# EAGLE board Amazing Leelo (EAGLE 9.7.0)

Size 166.4 x 105.07 mm. Coordinates in mm from the lower left corner, seen from the top.
Outline: 0,0 166.4,0 166.4,105.07 0,105.07 0,0
Copper layers (1*16): Top 0.035mm / dielectric 1.5mm / Bottom 0.035mm
Design rules "default": minimum track width 6mil, minimum drill 0.35mm, track to track 6mil, track to pad 6mil, pad to pad 6mil, via to via 6mil, smd to smd 6mil, copper to edge 40mil, drill to drill 6mil, minimum pad ring 10mil, minimum via ring 8mil, stop-mask expansion 4mil, vias tented up to drill 0mil, thermal gap 10mil

## Footprints (pad centres in the part's own frame; a part is rotated, then mirrored left to right if it is on the bottom)
LEDRD254W60D565H860B = drill 0.981 pad 1.581: 1 -1.27,0; 2 1.27,0
LEDRD254W60D565H860B_B = drill 0.981 pad 1.581: 1 -1.27,0; 2 1.27,0
HC-SR04 = drill 1.016 long: 1 -3.81,0; 2 -1.27,0; 3 1.27,0; 4 3.81,0
RESAD1016W63L850D250B = drill 0.83 pad 1.43: 1 -5.08,0; 2 5.08,0
HA-06-SM065 = drill 1 pad 1.676: 1 -2.54,-2.54; 2 0,2.54; 3 2.54,-2.54
SWITCH-SPDT-PTH-8.5X3.7MM = drill 1.016 pad 1.88: 1 -2.54,0; 2 0,0; 3 2.54,0
SG90 = drill 1.016 long: 1 -2.54,0; 2 0,0; 3 2.54,0
ARDUINO-UNO-R3-SHIELD = drill 1.016 pad 1.88: 3.3V 24.13,-2.54; 5V 24.13,0; A0 24.13,12.7; A1 24.13,15.24; A2 24.13,17.78; A3 24.13,20.32; A4 24.13,22.86; A5 24.13,25.4; AREF -24.13,-13.97; D2 -24.13,20.32; D3 -24.13,17.78; D4 -24.13,15.24; D5 -24.13,12.7; D6 -24.13,10.16; D7 -24.13,7.62; D8 -24.13,3.81; D9 -24.13,1.27; D10 -24.13,-1.27; D11 -24.13,-3.81; D12 -24.13,-6.35; D13 -24.13,-8.89; GND@0 24.13,2.54; GND@1 24.13,5.08; GND@2 -24.13,-11.43; IOREF 24.13,-7.62; NC 24.13,-10.16; RES 24.13,-5.08; RX -24.13,25.4; SCL -24.13,-19.05; SDA -24.13,-16.51; TX -24.13,22.86; VIN 24.13,7.62
TSOP48 = drill 0.8: 1 -2.54,0; 2 0,0; 3 2.54,0

## Placement (x,y rotation side)
D1  RED  [LEDRD254W60D565H860B]  66.01,27.94 180 top
D2  BLUE  [LEDRD254W60D565H860B_B]  73.63,27.94 180 top
DIST1  DISTANCE-SENSOR-4PINHC-SR04  [HC-SR04]  140.36,70.54 0 top
R1  250  [RESAD1016W63L850D250B]  64.74,17.78 90 top
RPOT1  250k  [HA-06-SM065]  44.42,33.02 0 top
S1  TOGGLE  [SWITCH-SPDT-PTH-8.5X3.7MM]  82.52,15.24 0 top
SERVO1  SERVOSG90  [SG90]  7.06,42.2 0 top
U1  ARDUINO-UNO-R3-SHIELD  [ARDUINO-UNO-R3-SHIELD]  62.06,75.22 270 top
U2  IR-RECEIVERTSOP48  [TSOP48]  97.76,10.16 0 top

## Library data of the parts
D1 = Tinkercad; CATEGORY: Opto-Electronic; SUB-CATEGORY: LED; VALUE: LED_RED
D2 = Tinkercad; CATEGORY: Opto-Electronic; SUB-CATEGORY: LED; VALUE: LED_BLUE
DIST1 R1 RPOT1 S1 SERVO1 U1 U2 = Tinkercad

## Nets
D2_C: D1.2 D2.2 R1.2
U1_5V: DIST1.1 RPOT1.3 S1.2 S1.3 SERVO1.2 U1.5V U1.D3 U2.3
U1_A0: RPOT1.2 U1.A0
U1_A1: DIST1.2 U1.A1
U1_A2: DIST1.3 U1.A2
U1_D5: D1.1 U1.D5
U1_D6: SERVO1.3 U1.D6
U1_D7: U1.D7 U2.1
U1_D8: D2.1 U1.D8
U1_GND: DIST1.4 R1.1 RPOT1.1 S1.1 SERVO1.1 U1.GND@0 U1.GND@1 U1.GND@2 U2.2

## Tracks (layer width: path | path; a pad name or v marks a point on that pad's centre or on a via)
D2_C  (2 unrouted)
U1_5V  (7 unrouted)
U1_A0  (1 unrouted)
U1_A1  (1 unrouted)
U1_A2  (1 unrouted)
U1_D5  (1 unrouted)
U1_D6  (1 unrouted)
U1_D7  (1 unrouted)
U1_D8  (1 unrouted)
U1_GND  (8 unrouted)